# EAGLE board OCT19 (EAGLE 7.7.0)

Size 100 x 80 mm. Coordinates in mm from the lower left corner, seen from the top.
Outline: 0,0 100,0 100,80 0,80 0,0
Copper layers (1*16): Top 0.035mm / dielectric 1.5mm / Bottom 0.035mm
Design rules "default": minimum track width 10mil, minimum drill 24mil, track to track 8mil, track to pad 8mil, pad to pad 8mil, via to via 8mil, smd to smd 8mil, copper to edge 40mil, drill to drill 8mil, minimum pad ring 10mil, minimum via ring 8mil, stop-mask expansion 4mil, vias tented up to drill 0mil, thermal gap 10mil

## Footprints (pad centres in the part's own frame; a part is rotated, then mirrored left to right if it is on the bottom)
0603-CAP = smd 1.1 x 1: 1 -0.85,0; 2 0.85,0
JSTPH3 = smd 1 x 4.6: 1 -2,-2.7; 2 0,-2.7; 3 2,-2.7 | smd 1.6 x 3.4: NC1 -4.4,2.5; NC2 4.4,2.5
TQFP32-08 = smd 1.27 x 0.559: 1 -4.293,2.8; 2 -4.293,2; 3 -4.293,1.2; 4 -4.293,0.4; 5 -4.293,-0.4; 6 -4.293,-1.2; 7 -4.293,-2; 8 -4.293,-2.8; 17 4.293,-2.8; 18 4.293,-2; 19 4.293,-1.2; 20 4.293,-0.4; 21 4.293,0.4; 22 4.293,1.2; 23 4.293,2; 24 4.293,2.8 | smd 0.559 x 1.27: 9 -2.8,-4.293; 10 -2,-4.293; 11 -1.2,-4.293; 12 -0.4,-4.293; 13 0.4,-4.293; 14 1.2,-4.293; 15 2,-4.293; 16 2.8,-4.293; 25 2.8,4.293; 26 2,4.293; 27 1.2,4.293; 28 0.4,4.293; 29 -0.4,4.293; 30 -1.2,4.293; 31 -2,4.293; 32 -2.8,4.293
SSOP24 = smd 0.4 x 1.25: 1 -3.575,-3.625; 2 -2.925,-3.625; 3 -2.275,-3.625; 4 -1.625,-3.625; 5 -0.975,-3.625; 6 -0.325,-3.625; 7 0.325,-3.625; 8 0.975,-3.625; 9 1.625,-3.625; 10 2.275,-3.625; 11 2.925,-3.625; 12 3.575,-3.625; 13 3.575,3.625; 14 2.925,3.625; 15 2.275,3.625; 16 1.625,3.625; 17 0.975,3.625; 18 0.325,3.625; 19 -0.325,3.625; 20 -0.975,3.625; 21 -1.625,3.625; 22 -2.275,3.625; 23 -2.925,3.625; 24 -3.575,3.625
TO252 = smd 1 x 1.6: 1 -2.28,-4.8; 2 2.28,-4.8 | smd 5.4 x 6.2: 3 0,2.5
AVRISP = drill 0.9 pad 1.626: 1 -1.27,2.54; 2 1.27,2.54; 3 -1.27,0; 4 1.27,0; 5 -1.27,-2.54; 6 1.27,-2.54
POWER_JACK_SMD = smd 2.8 x 2.4: GND 0,-5.7; P$4 6.1,-5.7; VIN0 0,5.7; VIN1 6.1,5.7 | hole 2.032: 0,0; 4.572,0
DIL08 = drill 0.813 offset: 1 -3.81,-3.81; 2 -1.27,-3.81; 3 1.27,-3.81; 4 3.81,-3.81; 5 3.81,3.81; 6 1.27,3.81; 7 -1.27,3.81; 8 -3.81,3.81
LED_1206 = smd 1.6 x 1.803: A -1.422,0; C 1.422,0
M0805 = smd 1.3 x 1.6: 1 -0.95,0; 2 0.95,0
AXIAL-0.4 = drill 0.9 pad 1.88: P$1 -5.08,0; P$2 5.08,0
RESONATOR-SMD = smd 0.45 x 1.905: 1 -1.2,0; 2 0,0; 3 1.2,0

## Placement (x,y rotation side)
C1  0.1uF  [0603-CAP]  -31.75,64.77 0 top  (outside the outline)
C2  0.1uF  [0603-CAP]  -35.56,64.77 0 top  (outside the outline)
C4  0.1uF  [0603-CAP]  -43.18,64.77 0 top  (outside the outline)
CN1  [JSTPH3]  -55.88,6.35 0 top  (outside the outline)
CN2  [JSTPH3]  -19.05,20.32 0 top  (outside the outline)
CN3  [JSTPH3]  -30.48,20.32 0 top  (outside the outline)
CN4  [JSTPH3]  -41.91,20.32 0 top  (outside the outline)
FRAME1  FRAME-LEDGER  [CREATIVE_COMMONS]  -101.6,45.72 0 top  (outside the outline)
IC1  ATMEGA168TQFP-08  [TQFP32-08]  19.05,22.86 0 top
IC2  TB6612FNG  [SSOP24]  22.86,38.1 0 top
IC3  7805DT  [TO252]  6.35,62.23 90 top
ISP1  AVRISP-6  [AVRISP]  19.05,10.16 0 top
J1  5.5x2.1mm Barrel  [POWER_JACK_SMD]  7.62,76.2 270 top
OK1  PC827  [DIL08]  -111.76,-12.7 0 top  (outside the outline)
PVAL1  [JSTPH3]  5.08,6.35 90 top
PVAL2  [JSTPH3]  5.08,40.64 90 top
PWR_LED  [LED_1206]  -46.99,59.69 0 top  (outside the outline)
R2(SMD)  [M0805]  -119.38,-26.67 0 top  (outside the outline)
R7  [AXIAL-0.4]  -19.05,59.69 0 top  (outside the outline)
R8  [AXIAL-0.4]  -31.75,59.69 0 top  (outside the outline)
SCK_LED  [LED_1206]  -57.15,59.69 0 top  (outside the outline)
SOIL-LEVEL  [JSTPH3]  5.08,29.21 90 top
WATER-LEVEL  [JSTPH3]  5.08,17.78 90 top
Y2  16MHZ  [RESONATOR-SMD]  -27.94,66.04 0 top  (outside the outline)

## Library data of the parts
C1 C2 C4 = SparkFun-Capacitors; PROD_ID: CAP-00810
CN1-CN4 IC2 IC3 ISP1 PVAL1 PVAL2 R2(SMD) SOIL-LEVEL WATER-LEVEL = adafruit
FRAME1 = SparkFun-Aesthetics
IC1 = atmega328p
J1 = SparkFun-Connectors; PROD_ID: CONN-08106; SF_ID: PRT-12748
OK1 = optocoupler; OC_FARNELL: unknown; OC_NEWARK: unknown
PWR_LED SCK_LED = eagle-ltspice; SPICEMODEL: NONE; SPICEPREFIX: D; SPICETYPE: diode
R7 R8 = SparkFun-Resistors
Y2 = SparkFun-FreqCtrl; PROD_ID: XTAL-08900

## Nets
+5V: C1.1 IC1.4 IC1.6 IC1.18 IC3.2 ISP1.2 PVAL1.2 PVAL2.2 PWR_LED.A R2(SMD).2 SOIL-LEVEL.2 WATER-LEVEL.2
+12V: C2.1 IC3.1 J1.VIN0
GND: C1.2 C2.2 C4.1 IC1.3 IC1.5 IC1.21 IC2.18 IC3.3 ISP1.6 J1.GND J1.P$4 PVAL1.3 PVAL2.3 R8.P$2 SCK_LED.C SOIL-LEVEL.3 WATER-LEVEL.3 Y2.2
MISO: IC1.16 ISP1.1
MOSI: IC1.15 ISP1.4
N$1: C4.2 IC1.29 ISP1.5 R2(SMD).1
N$10: R7.P$2 SCK_LED.A
N$12: PWR_LED.C R8.P$1
PB0: IC1.12
PB1: IC1.13
PB2: IC1.14
PC0: IC1.23 PVAL1.1
PC1: IC1.24 PVAL2.1
PC2: IC1.25 SOIL-LEVEL.1
PC3: IC1.26 WATER-LEVEL.1
PC4: IC1.27
PC5: IC1.28
PD2: IC1.32
PD3: IC1.1
PD4: IC1.2
PD5: IC1.9
PD6: IC1.10
PD7: IC1.11
PGND1: IC2.3
PGND1': IC2.4
PGND2: IC2.9
PGND2': IC2.10
SCK: IC1.17 ISP1.3 R7.P$1
VCC: IC2.20
VM1: IC2.24
VM2: IC2.13
VM3: IC2.14
XTAL1: IC1.7 Y2.3
XTAL2: IC1.8 Y2.1

## Tracks (layer width: path | path; a pad name or v marks a point on that pad's centre or on a via)
+5V  (11 unrouted)
+12V  (2 unrouted)
GND  (17 unrouted)
MISO  (1 unrouted)
MOSI  (1 unrouted)
N$1  (3 unrouted)
N$10  (1 unrouted)
N$12  (1 unrouted)
PC0  (1 unrouted)
PC1  (1 unrouted)
PC2  (1 unrouted)
PC3  (1 unrouted)
SCK  (2 unrouted)
XTAL1  (1 unrouted)
XTAL2  (1 unrouted)
(copper drawn outside any net)
  shapes: Bottom area x1